# Altium PCB DTB217-AW1.PcbDoc
Units mil, origin at the board's own origin, x right, y up, seen from the top; angles counter-clockwise.
Board outline 2755.91 x 787.4 mil, 2 copper layers (Top Layer, Bottom Layer), stack 62 mil thick; 13 components, 2 nets, 15 pads, 0 vias.
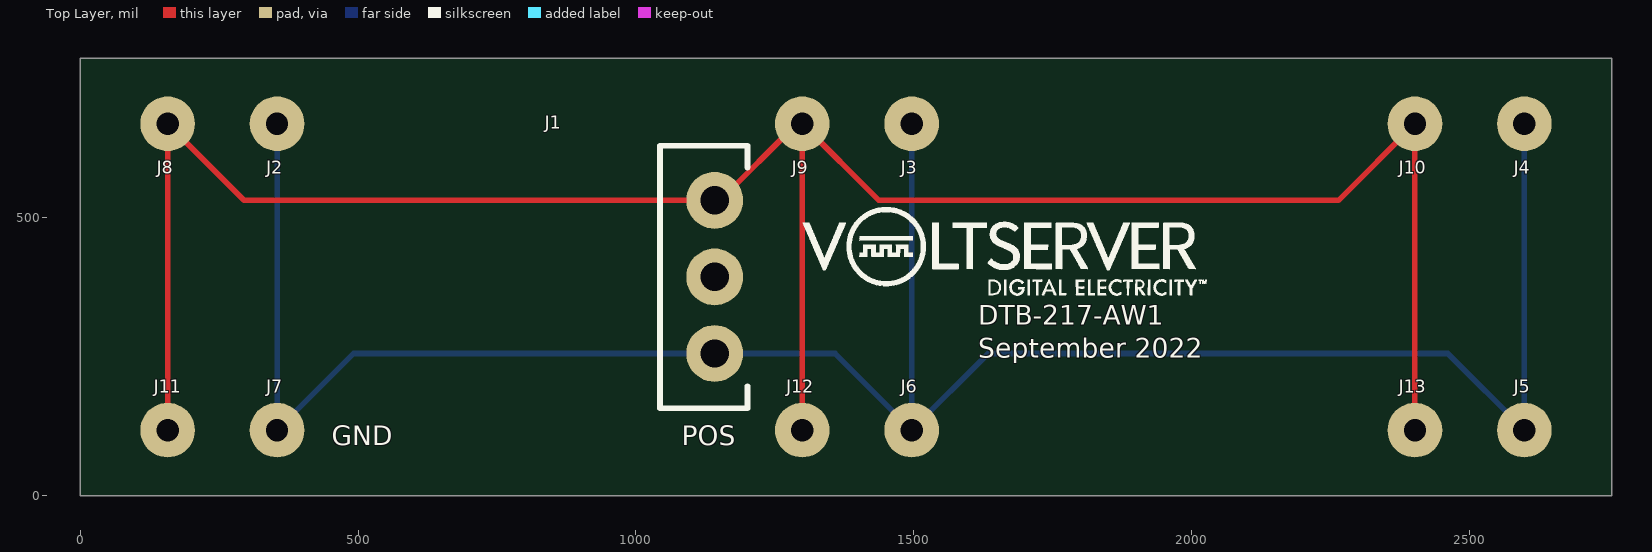
[diagram p0: Top Layer view]
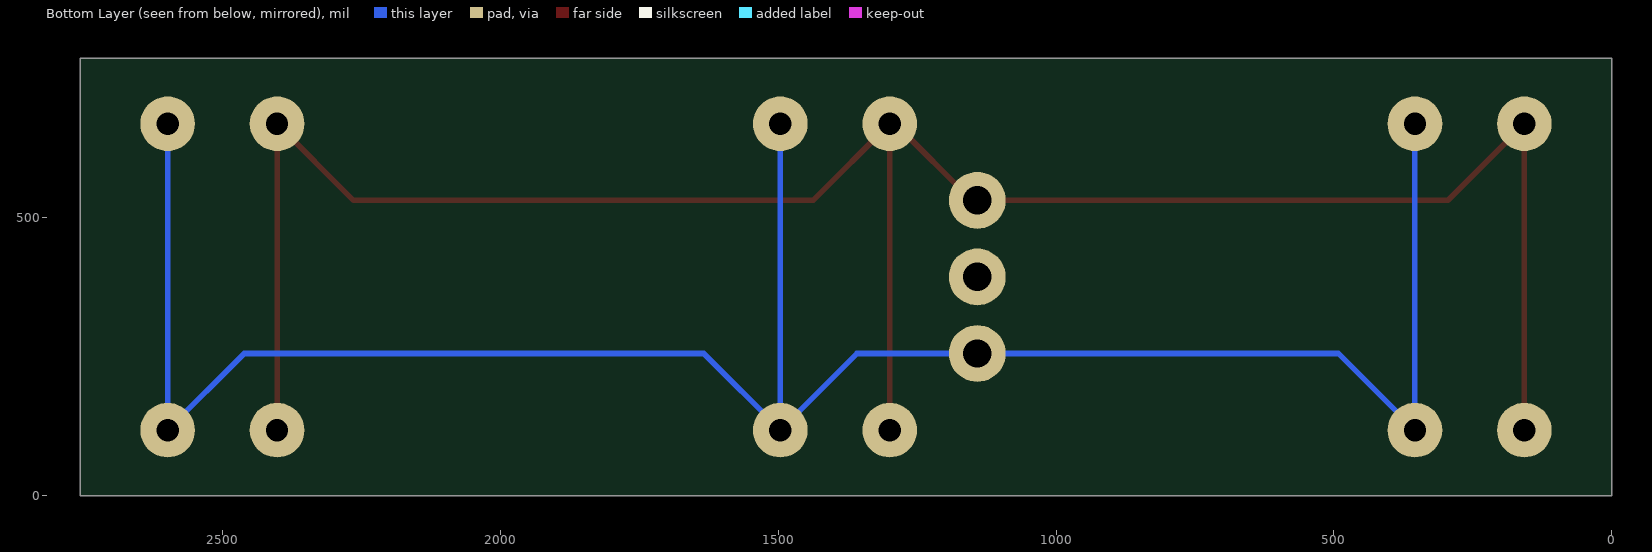
[diagram p1: Bottom Layer view, seen from below]

## Layer stack, top to bottom
Top Solder: solder mask 0.4, Solder Resist, Dk 3.5
Top Layer: signal copper 1.4
Dielectric 1: dielectric 59.2, FR-4, Dk 4.8
Bottom Layer: signal copper 1.4
Bottom Solder: solder mask 0.4, Solder Resist, Dk 3.5

## Board outline
0,0 0,787.4 2755.91,787.4 2755.91,0

## Design rules (kind name [scope] priority, off if disabled: settings)
Clearance [All] p1: gap=10 ignorepadtopadclearanceinfootprint=FALSE except(0: Arc-Hole Track-Hole SMDPad-Hole THPad-Hole Via-Hole Fill-Hole Poly-Hole Region-Hole Text-Hole)
PolygonConnect [All] p1: connectstyle=Relief reliefconductorwidth=10 reliefentries=4 polygonreliefangle="90 Angle" airgapwidth=10
RoutingVias [All] p1: holewidth=28 width=50 viastyle="Through Hole" minholewidth=28 minwidth=50 maxholewidth=28 maxwidth=50
SolderMaskExpansion [All] p1: expansion=4 istentingtop=FALSE
Width [All] p1: maxlimit=10 minlimit=10 preferedwidth=10
30 further rules are at their usual default settings.

## Components (designator, comment, footprint, x,y, rotation, side; value= is the part's Value field where it differs from the comment)
J1 "1844223" 1844223 1141.73,393.7 r270 top
J2 "CONN HEADER VERT 1POS" TSW-101-17-G-S 354.33,669.29 r0 top value="1 position connector header"
J3 "CONN HEADER VERT 1POS" TSW-101-17-G-S 1496.06,669.29 r0 top value="1 position connector header"
J4 "CONN HEADER VERT 1POS" TSW-101-17-G-S 2598.43,669.29 r0 top value="1 position connector header"
J5 "CONN HEADER VERT 1POS" TSW-101-17-G-S 2598.43,118.11 r0 top value="1 position connector header"
J6 "CONN HEADER VERT 1POS" TSW-101-17-G-S 1496.06,118.11 r0 top value="1 position connector header"
J7 "CONN HEADER VERT 1POS" TSW-101-17-G-S 354.33,118.11 r0 top value="1 position connector header"
J8 "CONN HEADER VERT 1POS" TSW-101-17-G-S 157.48,669.29 r0 top value="1 position connector header"
J9 "CONN HEADER VERT 1POS" TSW-101-17-G-S 1299.21,669.29 r0 top value="1 position connector header"
J10 "CONN HEADER VERT 1POS" TSW-101-17-G-S 2401.57,669.29 r0 top value="1 position connector header"
J11 "CONN HEADER VERT 1POS" TSW-101-17-G-S 157.48,118.11 r0 top value="1 position connector header"
J12 "CONN HEADER VERT 1POS" TSW-101-17-G-S 1299.21,118.11 r0 top value="1 position connector header"
J13 "CONN HEADER VERT 1POS" TSW-101-17-G-S 2401.57,118.11 r0 top value="1 position connector header"

## Footprints (in the part's own frame and the unit in brackets; to place one, negate y for a bottom-side part, rotate by r counter-clockwise, add the part's x,y. Pads: shape width x height; smd on the part's side, far side on the other; paste and mask are expansions set on the pad)
1844223 [mm]
  round 2.6 hole 1.3: 1(-3.5,0) 2(0,0) 3(3.5,0)
  silkscreen extent -6,-2.5 6,1.5, body extent -6.05,-7.9 5.85,1.3, height 7.25
TSW-101-17-G-S [mm]
  round 2.5 hole 1.02: 1(0,0)
  body extent -1.27,-1.27 1.27,1.27, height 18.29

## Part data
J1: "3 Position Terminal Block Header, Male Pins, Shrouded (4 Side) 0.138\" (3.50mm) 90°, Right Angle Through Hole", Manufacturer="Phoenix Contact", VoltServer PN=CON-00009, Manufacturer PN=1844223, Vendor=Digikey, Vendor PN=277-2415-ND
J2 J3 J4 J5 J6 J7 J8 J9 J10 J11 J12 J13: library part TSW-101-17-G-S, "Connector Header Through Hole 1 position", Manufacturer="Samtec Inc", Manufacturer PN=TSW-101-17-G-S, Vendor=Digi-Key, Vendor PN=SAM1061-01-ND

## Nets (pads, with @x,y where several pads share a name; then routed paths per layer and width w, separated by ;. In a path a pad name is that pad's centre, name@x,y a point inside that pad or via, vN(x,y) a via of type N, cw(c..) or ccw(c..) an arc to the next point about the centre after c; other vN are vias at no path point)
Ground: J1.3 J2.1 J3.1 J4.1 J5.1 J6.1 J7.1 | length 4125.9
  Bottom Layer w10: J2.1 J7.1 492.13,255.91 J1.3 1358.27,255.91 J6.1 ; J3.1 J6.1 ; J4.1 J5.1 2460.63,255.91 1633.86,255.91 J6.1
Positive: J1.1 J8.1 J9.1 J10.1 J11.1 J12.1 J13.1 | length 4125.9
  Top Layer w10: J11.1 J8.1 295.28,531.5 J1.1 1151.57,531.5 1289.37,669.29 J9.1 ; J12.1 J9.1 ; J13.1 J10.1 2263.78,531.5 1437.01,531.5 J9.1
pads on no net: J1.2

## Silkscreen, mask and mechanical layers (free items; w line width, h text height)
Top Overlay:
  drawing of 32 lines, arcs and shapes, not listed
  text "DTB-217-AW1 / September 2022" at 1616.15,236.22 h60
  text "GND" at 452.76,79.41 h60
  text "POS" at 1082.68,79.41 h60
Mechanical 1:
  the board outline again, w10